# Altium PCB MCUBOARD_V1.PcbDoc (part 2 of 2)
Units mm, origin at the board's own origin, x right, y up, seen from the top; angles counter-clockwise.
Board outline 60 x 75 mm, 6 copper layers (GND-SIG1, SIG, GND, PWR, GND-1, GND-SIG2), stack 0.816 mm thick; 132 components, 125 nets, 546 pads, 166 vias.
Unrouted connection lines stored in the file: 93.
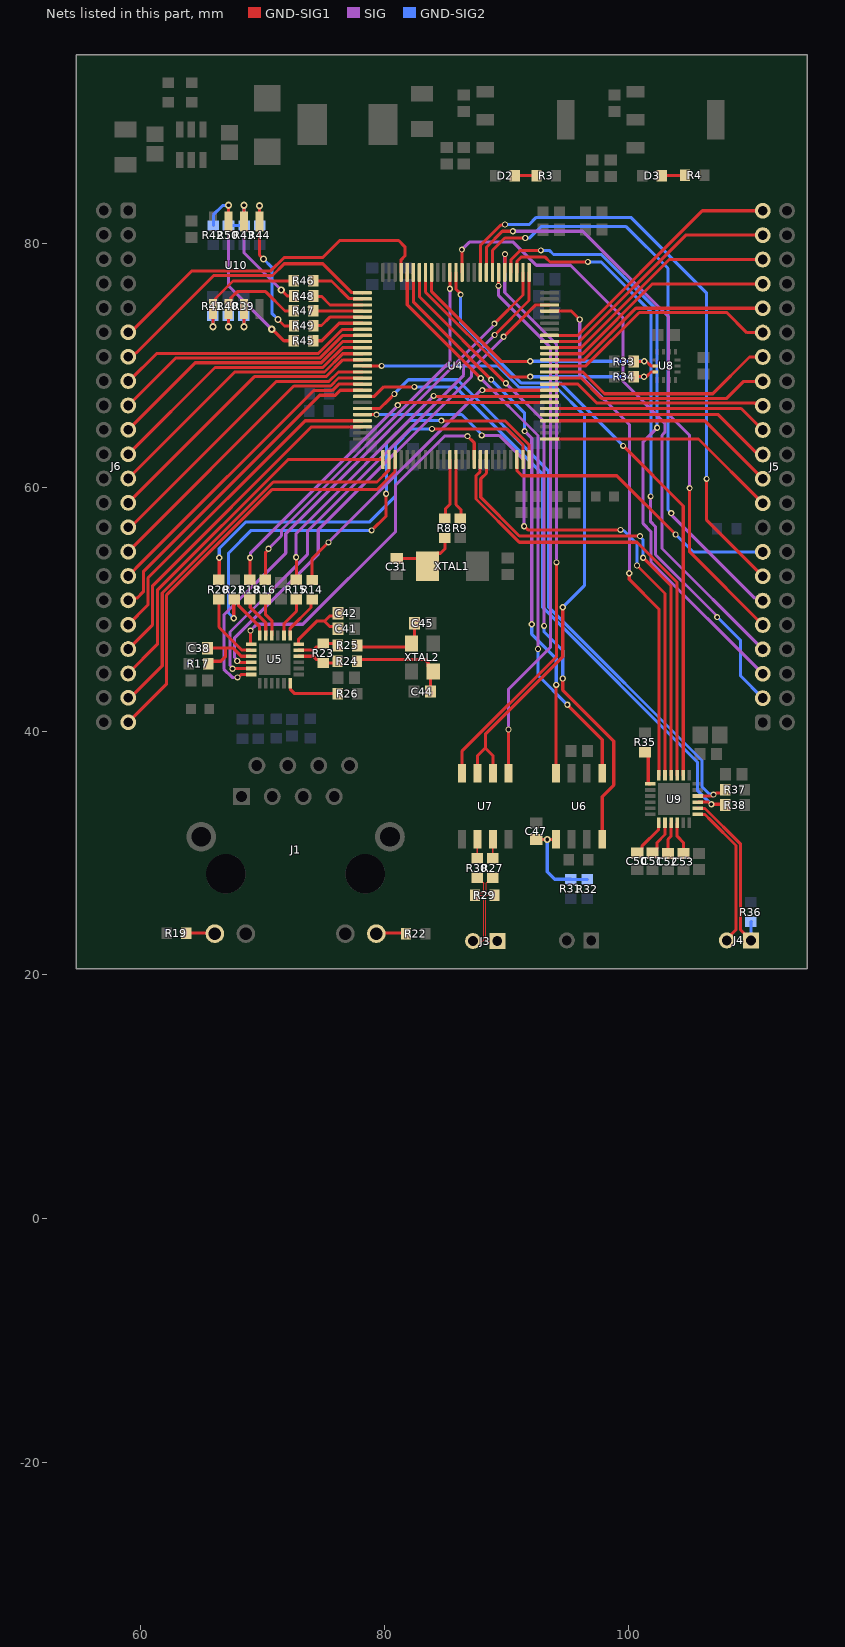
[diagram p5: the nets of this part, all layers, seen from the top]

## Via types
v1: diameter 0.6, hole 0.3, GND-SIG1 to GND-SIG2, tented both sides, 88 vias
v2: diameter 0.5, hole 0.3, GND-SIG1 to GND-SIG2, tented both sides, 78 vias

## Nets (pads, with @x,y where several pads share a name; then routed paths per layer and width w, separated by ;. In a path a pad name is that pad's centre, name@x,y a point inside that pad or via, vN(x,y) a via of type N, cw(c..) or ccw(c..) an arc to the next point about the centre after c; other vN are vias at no path point) (continued)
NetC31_1: C31.1 R8.1 XTAL1.1 | length 5.9
  GND-SIG1 w0.254: C31.1@81,54.183 82.856,54.183 XTAL1.1@83.511,53.527 83.511,53.777 84.334,54.6 84.588,54.6 84.949,54.962 R8.1@84.949,55.852
NetC41_1: C41.1 C42.2 U5.6 | length 5.9
  GND-SIG1 w0.254: U5.6@72.939,47.142 72.939,47.539 74.422,49.022 75.057,49.022 ; C42.2@76.167,49.672 75.945,49.45 75.485,49.45 75.057,49.022 ; C41.1@76.18,48.397 75.995,48.582 75.497,48.582 75.057,49.022
NetC44_1: C44.1 R24.2 XTAL2.3 | length 8.7
  GND-SIG1 w0.254: R24.2@77.728,45.731 77.888,45.891 83.291,45.891 83.58,45.603 83.58,45.317 XTAL2.3@84.003,44.894 83.758,44.649 C44.1@83.758,43.24
NetC45_1: C45.1 R25.1 XTAL2.1 | length 6.4
  GND-SIG1 w0.254: R25.1@77.752,47.028 77.884,46.896 81.904,46.896 XTAL2.1@82.203,47.194 82.447,47.439 C45.1@82.447,48.849
NetC47_1: C47.1 R31.2 R32.1 U6.5 | length 7.7
  GND-SIG1 w0.254: C47.1@92.516,31.1 93.342,31.1 94.03,31.1 U6.5@94.05,31.12
  GND-SIG2 w0.254: v1@93.345,31.115 93.345,28.448 93.949,27.844 R31.2@95.29,27.844 95.299,27.834 R32.1@96.627,27.834
  other v1: 93.342,31.104
NetC50_2: C50.2 U9.1 | length 3.2
  GND-SIG1 w0.254: C50.2@100.738,29.991 100.788,29.991 101.111,30.314 101.111,30.542 102.486,31.917 102.486,32.444 U9.1@102.509,32.467
NetC51_1: C51.1 U9.2 | length 2.9
  GND-SIG1 w0.254: C51.1@101.991,29.992 102.041,29.992 102.364,30.315 102.364,30.863 103.009,31.508 U9.2@103.009,32.467
NetC52_1: C52.1 U9.3 | length 2.6
  GND-SIG1 w0.254: C52.1@103.251,29.972 103.251,31.115 103.505,31.369 103.505,32.463 U9.3@103.509,32.467
NetC53_2: C53.2 U9.4 | length 2.7
  GND-SIG1 w0.254: U9.4@104.009,32.467 104.009,31.373 104.521,30.861 C53.2@104.521,29.972
NetD2_1: D2.1 R3.2 | length 1.8
  GND-SIG1 w0.254: D2.1@90.678,85.598 R3.2@92.468,85.598
NetD3_1: D3.1 R4.2 | length 1.9
  GND-SIG1 w0.254: D3.1@102.743,85.598 104.63,85.598 R4.2@104.653,85.621
NetJ1_9: J1.9 R19.1 | length 2.4
  GND-SIG1 w0.254: R19.1@63.715,23.391 63.745,23.421 J1.9@66.151,23.421
NetJ1_12: J1.12 R22.1 | length 2.4
  GND-SIG1 w0.254: J1.12@79.401,23.421 81.711,23.421 R22.1@81.756,23.376
NetJ5_3: J5.3 U4.53 | length 49.4
  GND-SIG1 w0.254: U4.53@90.854,77.655 90.867,77.668 90.867,78.571 91.194,78.898 93.174,78.898 93.576,78.496 96.666,78.496 v2(96.683,78.512)
  SIG w0.254: v2(101.833,59.265) 101.833,57.171 102.235,56.769 102.235,54.483 v2@107.315,49.403
  GND-SIG2 w0.254: v2(96.683,78.512) 97.764,78.512 101.854,74.422 v2@101.854,59.309 ; v2(107.294,49.359) 109.22,47.432 109.22,44.518 J5.3@111.03,42.708
NetJ5_5: J5.5 U4.54 | length 49.8
  GND-SIG1 w0.254: U4.54@90.354,77.655 90.354,78.67 91.144,79.46 v2(92.821,79.46)
  SIG w0.254: v2(102.366,64.901) 101.219,63.753 101.219,57.023 101.854,56.388 101.854,53.884 J5.5@111.03,44.708
  GND-SIG2 w0.254: v2(92.821,79.46) 93.514,79.46 93.853,79.121 97.79,79.121 102.366,74.545 v2@102.366,64.887
NetJ5_7: J5.7 U4.62 | length 50.1
  GND-SIG1 w0.254: v2(86.338,79.52) 86.354,79.504 U4.62@86.354,77.655
  SIG w0.254: v2(86.338,79.52) 86.955,80.137 90.551,80.137 92.456,78.232 95.25,78.232 99.568,73.914 99.568,68.707 102.997,65.278 102.997,64.516 102.757,64.276 102.757,54.981 J5.7@111.03,46.708
NetJ5_9: J5.9 U4.58 | length 49.1
  GND-SIG1 w0.254: U4.58@88.354,77.655 88.354,79.718 89.662,81.026 v2(90.526,81.026) ; v2(105.029,59.944) 105.029,54.709 J5.9@111.03,48.708
  SIG w0.254: v2(90.526,81.026) 96.266,81.026 103.311,73.981 103.311,65.98 105.029,64.262 v2(105.029,59.944) ; J5.9@110.922,48.816 J5.9@111.03,48.708
NetJ5_11: J5.11 U4.57 | length 49.2
  GND-SIG1 w0.254: U4.57@88.854,77.655 88.854,79.456 89.866,80.468 v2(91.541,80.468)
  SIG w0.254: v2(103.523,57.886) 103.571,57.839 103.571,57.719 110.382,50.908 110.83,50.908 J5.11@111.03,50.708
  GND-SIG2 w0.254: v2(91.541,80.468) 91.554,80.482 91.912,80.482 92.837,81.407 99.822,81.407 103.251,77.978 103.251,58.159 v2(103.523,57.886)
NetJ5_13: J5.13 U4.59 | length 49.5
  GND-SIG1 w0.254: U4.59@87.854,77.655 87.854,79.853 89.536,81.535 89.835,81.535 v2(89.877,81.578) ; v2(106.426,60.706) 106.426,57.312 J5.13@111.03,52.708
  GND-SIG2 w0.254: v2(89.877,81.578) 91.865,81.578 92.456,82.169 100.203,82.169 106.426,75.946 v2(106.426,60.706)
NetJ5_15: J5.15 U4.23 | length 23.9
  GND-SIG1 w0.254: U4.23@90.854,62.295 90.854,61.384 91.278,60.96 99.06,60.96 v2(103.886,56.134)
  GND-SIG2 w0.254: v2(103.886,56.134) 105.312,54.708 J5.15@111.03,54.708
NetJ5_19: J5.19 U4.26 | length 19.7
  GND-SIG1 w0.254: U4.26@93.534,63.975 105.763,63.975 J5.19@111.03,58.708
NetJ5_21: J5.21 U4.29 | length 19.5
  GND-SIG1 w0.254: U4.29@93.534,65.475 106.263,65.475 J5.21@111.03,60.708
NetJ5_23: J5.23 U4.30 | length 18.8
  GND-SIG1 w0.254: U4.30@93.534,65.975 107.38,65.975 J5.23@110.871,62.484
NetJ5_25: J5.25 U4.31 | length 18.2
  GND-SIG1 w0.254: U4.31@93.534,66.475 109.263,66.475 J5.25@111.03,64.708
NetJ5_27: J5.27 U4.35 | length 18.2
  GND-SIG1 w0.254: U4.35@93.534,68.475 95.863,68.475 97.409,66.929 110.358,66.929 110.379,66.908 110.83,66.908 J5.27@111.03,66.708
NetJ5_29: J5.29 U4.36 | length 18.8
  GND-SIG1 w0.254: U4.36@93.534,68.975 96.125,68.975 97.79,67.31 108.077,67.31 109.475,68.708 J5.29@111.03,68.708
NetJ5_31: J5.31 U4.37 | length 19.4
  GND-SIG1 w0.254: U4.37@93.595,69.469 96.266,69.469 98.044,67.691 106.934,67.691 109.951,70.708 J5.31@111.03,70.708
NetJ5_33: J5.33 U4.38 | length 20
  GND-SIG1 w0.254: U4.38@93.534,69.975 96.518,69.975 100.907,74.364 108.077,74.364 109.733,72.708 J5.33@111.03,72.708
NetJ5_35: J5.35 U4.39 | length 19.2
  GND-SIG1 w0.254: U4.39@93.534,70.475 96.383,70.475 100.616,74.708 J5.35@111.03,74.708
NetJ5_37: J5.37 U4.40 | length 19.9
  GND-SIG1 w0.254: U4.40@93.534,70.975 96.248,70.975 101.981,76.708 J5.37@111.03,76.708
NetJ5_39: J5.39 U4.41 | length 20.5
  GND-SIG1 w0.254: U4.41@93.534,71.475 96.113,71.475 103.346,78.708 J5.39@111.03,78.708
NetJ5_41: J5.41 U4.42 | length 21.1
  GND-SIG1 w0.254: U4.42@93.534,71.975 95.978,71.975 104.711,80.708 J5.41@111.03,80.708
NetJ5_43: J5.43 U4.43 | length 21.7
  GND-SIG1 w0.254: U4.43@93.534,72.475 95.843,72.475 106.076,82.708 J5.43@111.03,82.708
NetJ6_11: J6.11 U4.72 | length 28.3
  GND-SIG1 w0.254: J6.11@58.991,72.581 64.185,77.774 70.662,77.774 71.755,78.867 74.92,78.867 76.317,80.264 81.153,80.264 81.661,79.756 81.661,78.994 81.354,78.687 U4.72@81.354,77.655
NetJ6_13: J6.13 U4.76 | length 23.4
  GND-SIG1 w0.254: J6.13@58.95,70.731 59.233,70.731 59.533,71.031 59.601,71.031 65.971,77.401 70.797,77.401 71.755,78.359 74.93,78.359 77.301,75.988 78.161,75.988 U4.76@78.174,75.975
NetJ6_15: J6.15 U4.82 | length 20.9
  GND-SIG1 w0.254: J6.15@59.003,68.71 61.286,70.993 74.549,70.993 76.518,72.962 78.161,72.962 U4.82@78.174,72.975
NetJ6_17: J6.17 U4.83 | length 21.6
  GND-SIG1 w0.254: J6.17@58.95,66.731 62.831,70.612 74.676,70.612 76.526,72.462 78.161,72.462 U4.83@78.174,72.475
NetJ6_19: J6.19 U4.84 | length 22.2
  GND-SIG1 w0.254: J6.19@58.95,64.731 64.45,70.231 74.803,70.231 76.547,71.975 U4.84@78.174,71.975
NetJ6_21: J6.21 U4.85 | length 22.8
  GND-SIG1 w0.254: J6.21@58.95,62.731 66.069,69.85 74.93,69.85 76.555,71.475 U4.85@78.174,71.475
NetJ6_23: J6.23 U4.86 | length 23.5
  GND-SIG1 w0.254: J6.23@58.95,60.731 67.688,69.469 75.057,69.469 76.563,70.975 U4.86@78.174,70.975
NetJ6_25: J6.25 U4.87 | length 24.1
  GND-SIG1 w0.254: J6.25@58.95,58.731 69.307,69.088 75.184,69.088 76.571,70.475 U4.87@78.174,70.475
NetJ6_27: J6.27 U4.89 | length 24.6
  GND-SIG1 w0.254: J6.27@58.928,56.515 71.12,68.707 75.438,68.707 76.206,69.475 U4.89@78.174,69.475
NetJ6_29: J6.29 U4.90 | length 25.1
  GND-SIG1 w0.254: J6.29@58.95,54.731 72.545,68.326 75.565,68.326 76.214,68.975 U4.90@78.174,68.975
NetJ6_31: J6.31 U4.91 | length 25.7
  GND-SIG1 w0.254: J6.31@58.95,52.731 60.198,53.979 74.164,67.945 75.692,67.945 76.222,68.475 U4.91@78.174,68.475
NetJ6_33: J6.33 U4.92 | length 27.3
  GND-SIG1 w0.254: J6.33@58.95,50.731 59.151,50.931 59.694,50.931 60.198,51.435 60.198,53.086 74.676,67.564 75.946,67.564 76.357,67.975 U4.92@78.174,67.975
NetJ6_35: J6.35 U4.97 | length 27.5
  GND-SIG1 w0.254: J6.35@58.95,48.731 60.579,50.36 60.579,52.578 73.476,65.475 U4.97@78.174,65.475
NetJ6_37: J6.37 U4.98 | length 28.7
  GND-SIG1 w0.254: J6.37@58.95,46.731 60.96,48.741 60.96,51.943 73.992,64.975 U4.98@78.174,64.975
NetJ6_39: J6.39 U4.1 | length 30.8
  GND-SIG1 w0.254: J6.39@58.95,44.731 61.341,47.122 61.341,51.562 72.074,62.295 U4.1@79.854,62.295
NetJ6_41: J6.41 U4.2 | length 33.8
  GND-SIG1 w0.254: J6.41@58.801,42.418 61.744,45.361 61.744,51.33 70.866,60.452 79.375,60.452 80.341,61.418 80.341,62.282 U4.2@80.354,62.295
NetJ6_43: J6.43 U4.3 | length 35.7
  GND-SIG1 w0.254: J6.43@58.95,40.731 62.103,43.884 62.103,51.181 70.739,59.817 79.375,59.817 80.854,61.296 U4.3@80.854,62.295
NetR8_2: R8.2 U4.12 | length 5.1
  GND-SIG1 w0.254: R8.2@84.986,57.392 84.986,58.233 85.352,58.599 U4.12@85.352,62.297
NetR9_2: R9.2 U4.13 | length 5.1
  GND-SIG1 w0.254: U4.13@85.852,62.297 85.852,58.589 86.256,58.185 R9.2@86.256,57.392
NetR14_1: R14.1 U4.34 | length 27
  GND-SIG1 w0.254: R14.1@74.041,52.4 74.041,54.134 v2(75.393,55.487) ; v2(88.019,67.98) 88.024,67.975 U4.34@93.53,67.975
  SIG w0.254: v2(75.393,55.487) 75.395,55.487 87.841,67.933 87.971,67.933 v2(88.019,67.98)
NetR14_2: R14.2 U5.7 | length 3.7
  GND-SIG1 w0.254: U5.7@72.239,47.842 72.247,47.85 72.247,48.439 73.951,50.143 73.951,50.71 R14.2@74.041,50.8
NetR15_1: R15.1 U4.33 | length 29.3
  GND-SIG1 w0.254: v2(72.732,54.268) 72.771,54.229 72.771,52.435 R15.1@72.748,52.412 ; v2(84.021,67.513) 84.062,67.472 U4.33@93.531,67.472
  SIG w0.254: v2(72.732,54.268) 72.732,56.223 v2(84.021,67.513)
NetR15_2: R15.2 U5.8 | length 3.4
  GND-SIG1 w0.254: U5.8@71.739,47.842 71.739,48.811 72.771,49.843 72.771,50.789 R15.2@72.748,50.812
NetR16_1: R16.1 U4.64 | length 31.5
  GND-SIG1 w0.254: R16.1@70.208,52.412 70.208,54.644 70.463,54.899 v2(70.463,54.966) ; U4.64@85.352,77.657 U4.64@85.354,77.655 v2@85.353,76.305
  SIG w0.254: v2(70.463,54.966) 71.538,56.04 71.538,56.511 85.352,70.325 v2(85.352,76.304)
NetR16_2: R16.2 U5.10 | length 3.2
  GND-SIG1 w0.254: R16.2@70.208,50.812 70.208,49.592 70.739,49.061 U5.10@70.739,47.842
NetR18_1: R18.1 U4.32 | length 31.9
  GND-SIG1 w0.254: R18.1@68.938,52.412 68.961,52.435 v2(68.961,54.229) ; v2(81.072,66.757) 81.124,66.757 81.344,66.977 U4.32@93.532,66.977
  SIG w0.254: v2(68.961,54.229) 68.973,54.241 68.973,54.602 81.072,66.701 v2(81.072,66.757)
NetR18_2: R18.2 U5.11 | length 3.5
  GND-SIG1 w0.254: R18.2@68.938,50.812 68.971,50.779 68.971,50.155 70.239,48.887 U5.11@70.239,47.842
NetR20_1: R20.1 U4.24 | length 35.8
  GND-SIG1 w0.254: R20.1@66.398,52.412 66.421,52.435 v2(66.421,54.229) ; v2(83.889,64.809) 83.919,64.78 90.074,64.78 91.354,63.5 U4.24@91.354,62.295
  GND-SIG2 w0.254: v2(66.421,54.229) 66.421,54.991 68.58,57.15 78.74,57.15 80.899,59.309 80.899,63.5 82.208,64.809 v2(83.889,64.809)
NetR20_2: R20.2 U5.14 | length 5.7
  GND-SIG1 w0.254: R20.2@66.398,50.812 66.398,48.537 68.293,46.642 U5.14@69.039,46.642
NetR21_2: R21.2 U4.25 U5.12 | length 45.6
  GND-SIG1 w0.254: v2(67.614,49.261) 67.614,50.758 R21.2@67.668,50.812 ; R21.2@67.718,50.812 68.016,50.514 68.016,50.281 69.739,48.558 U5.12@69.739,47.842 ; v2(78.937,56.475) 80.12,57.658 v2(80.12,59.483) ; v2(84.654,65.481) 84.676,65.459 89.895,65.459 91.854,63.5 U4.25@91.854,62.295
  GND-SIG2 w0.254: v2(67.614,49.261) 67.183,49.692 67.183,54.61 69.048,56.475 v2(78.937,56.475) ; v2(80.12,59.483) 80.137,59.5 80.137,63.62 81.998,65.481 v2(84.654,65.481)
NetR23_1: R23.1 R25.2 U5.5 | length 3.5
  GND-SIG1 w0.254: U5.5@72.939,46.642 74.122,46.642 74.375,46.895 74.653,46.895 R23.1@74.951,47.193 75.987,47.193 R25.2@76.152,47.028
NetR23_2: R23.2 R24.1 U5.4 | length 3.5
  GND-SIG1 w0.254: U5.4@72.939,46.142 74.127,46.142 74.378,45.891 74.653,45.891 R23.2@74.951,45.593 75.99,45.593 R24.1@76.128,45.731
NetR26_2: R26.2 U5.24 | length 4.6
  GND-SIG1 w0.254: U5.24@72.239,43.942 72.262,43.919 72.262,43.432 72.623,43.071 R26.2@76.152,43.071
NetR27_1: R27.1 U7.7 | length 1.6
  GND-SIG1 w0.127: R27.1@88.877,29.552 88.881,29.556 U7.7@88.881,31.115
NetR30_1: R30.1 U7.6 | length 1.6
  GND-SIG1 w0.127: R30.1@87.607,29.552 87.611,29.556 U7.6@87.611,31.115
NetR33_2: R33.2 U4.67 U8.13 | length 23.3
  GND-SIG1 w0.254: U4.67@83.852,77.657 83.852,76.073 89.573,70.352 91.942,70.352 v2(91.948,70.358) ; R33.2@100.445,70.335 101.496,70.335 101.852,69.979 102.21,69.979 U8.13@102.211,69.977
  GND-SIG2 w0.254: v2(91.948,70.358) 101.261,70.357 v2@101.27,70.348
  other v2: 101.307,70.357
NetR34_1: R34.1 U4.68 U8.14 | length 24.4
  GND-SIG1 w0.254: U4.68@83.352,77.657 83.352,76.033 90.323,69.062 91.922,69.062 v2(91.948,69.088) ; R34.1@100.457,69.088 101.473,69.088 101.862,69.477 U8.14@102.211,69.477
  GND-SIG2 w0.254: v2(91.948,69.088) 91.951,69.085 101.28,69.085 v2@101.283,69.082
  other v2: 101.281,69.082
NetR35_1: R35.1 U9.19 | length 2.9
  GND-SIG1 w0.254: R35.1@101.369,38.266 101.636,37.999 101.636,35.69 101.659,35.667 U9.19@101.809,35.667
NetR37_2: R37.2 U4.95 U9.10 | length 54.1
  GND-SIG1 w0.254: U4.95@78.174,66.475 78.187,66.488 79.622,66.488 80.283,67.149 v2(80.801,67.667) ; U9.10@105.709,34.667 106.93,34.667 107.188,34.925 107.812,34.925 R37.2@107.962,35.075
  GND-SIG2 w0.254: v2(80.801,67.667) 80.801,67.685 81.95,68.834 85.979,68.834 93.472,61.341 93.472,50.165 106.045,37.592 106.045,35.433 106.647,34.831 106.942,34.831 v2(106.987,34.786)
NetR38_2: R38.2 U4.93 U9.9 | length 53.3
  GND-SIG1 w0.254: U4.93@78.174,67.475 79.159,67.475 79.939,68.255 v2(82.439,68.255) ; U9.9@105.709,34.167 106.574,34.167 106.743,33.998 v2(106.81,33.998) 107.833,33.998 R38.2@107.962,33.869
  GND-SIG2 w0.254: v2(82.439,68.255) 85.796,68.255 92.964,61.087 92.964,50.165 105.664,37.465 105.664,35.144 v2(106.81,33.998)
NetR39_1: R39.1 U10.3 | length 2.3
  GND-SIG1 w0.254: U10.3@68.453,74.632 68.455,74.63 v1(68.456,73.192) v1(68.456,73.192)
  GND-SIG2 w0.254: R39.1@68.43,74.08 68.456,74.054 v1(68.456,73.192)
NetR40_1: R40.1 R47.2 U10.2 | length 9.3
  GND-SIG1 w0.254: v1(67.18,73.186) 67.181,73.187 U10.2@67.181,74.573 ; U10.2@67.183,74.632 67.381,74.83 67.381,75.542 67.912,76.073 70.231,76.073 71.818,74.486 R47.2@72.55,74.486
  GND-SIG2 w0.254: R40.1@67.14,74.041 67.18,74.001 v1(67.18,73.186)
NetR41_1: R41.1 R46.2 U10.1 | length 10.2
  GND-SIG1 w0.254: v1(65.912,73.189) U10.1@65.913,74.585 ; U10.1@65.913,74.632 66.111,74.83 66.111,75.509 67.551,76.949 R46.2@72.552,76.949
  GND-SIG2 w0.254: v1(65.912,73.189) 65.912,74.018 R41.1@65.924,74.03
NetR42_1: R42.1 R45.1 U10.7 | length 17.7
  GND-SIG1 w0.254: U10.7@67.183,81.832 v1(67.183,83.148) ; v1@70.739,73.025 71.723,72.041 R45.1@72.552,72.041
  SIG w0.254: v1@67.183,83.185 67.183,76.543 v1(70.739,72.988)
  GND-SIG2 w0.254: R42.1@65.936,81.495 65.936,82.373 66.702,83.139 67.174,83.139 v1(67.183,83.148)
NetR43_1: R43.1 R48.1 R50.2 U10.6 | length 13.8
  GND-SIG1 w0.254: U10.6@68.453,81.832 v1(68.453,83.148) ; v1(71.501,76.2) 71.992,75.709 R48.1@72.555,75.709
  SIG w0.254: v1@68.453,83.185 68.453,79.248 v1(71.501,76.2)
  GND-SIG2 w0.254: R50.2@67.182,81.495 R43.1@68.476,81.495 68.453,81.518 v1(68.453,83.148)
NetR44_1: R44.1 R49.1 U10.5 | length 13.2
  GND-SIG1 w0.254: v1(69.723,83.128) U10.5@69.723,81.832 69.723,79.068 70.045,78.746 v1(70.06,78.746) ; v1(71.247,73.787) 71.778,73.256 R49.1@72.556,73.256
  GND-SIG2 w0.254: v1(69.723,83.128) 69.723,81.518 R44.1@69.746,81.495 ; v1(70.06,78.746) 70.739,78.067 70.739,74.295 v1(71.247,73.787)
NetR45_2: R45.2 U4.81 | length 4.6
  GND-SIG1 w0.254: R45.2@74.152,72.041 74.835,72.041 76.271,73.477 U4.81@78.172,73.477
NetR46_1: R46.1 U4.77 | length 4.6
  GND-SIG1 w0.254: R46.1@74.152,76.949 75.636,76.949 77.095,75.49 77.46,75.49 77.462,75.488 78.161,75.488 U4.77@78.172,75.477
NetR47_1: R47.1 U4.79 | length 4
  GND-SIG1 w0.254: R47.1@74.15,74.483 U4.79@78.166,74.483
NetR48_2: R48.2 U4.78 | length 4.3
  GND-SIG1 w0.254: R48.2@74.155,75.709 74.18,75.683 74.812,75.683 75.52,74.975 U4.78@78.174,74.975
NetR49_2: R49.2 U4.80 | length 4.3
  GND-SIG1 w0.254: R49.2@74.191,73.256 74.224,73.289 74.813,73.289 75.501,73.977 U4.80@78.172,73.977
NetU4_16: U4.16 U5.13 | length 29.9
  GND-SIG1 w0.254: v2(68.991,48.25) 68.991,47.165 69.014,47.142 U5.13@69.039,47.142 ; v2(86.802,64.21) 87.354,63.659 U4.16@87.354,62.295
  SIG w0.254: v2(68.991,48.25) 69.508,48.768 73.279,48.768 80.899,56.388 80.899,60.198 84.911,64.21 v2(86.802,64.21)
NetU4_17: U4.17 U9.15 | length 38.6
  GND-SIG1 w0.254: U4.17@87.854,62.295 87.841,62.282 87.841,61.298 87.503,60.96 87.503,59.055 91.059,55.499 100.711,55.499 104.009,52.201 U9.15@104.009,36.367
NetU4_18: U4.18 U9.16 | length 38.4
  GND-SIG1 w0.254: U4.18@88.354,62.295 88.354,61.176 87.884,60.706 87.884,59.182 91.059,56.007 100.958,56.007 v2(100.961,56.004) ; v2(101.219,54.229) 103.509,51.939 U9.16@103.509,36.367
  GND-SIG2 w0.254: v2(100.961,56.004) 100.961,55.938 101.219,55.68 v2(101.219,54.229)
NetU4_47: U4.47 U9.18 | length 42.9
  GND-SIG1 w0.254: U4.47@93.534,74.475 95.324,74.475 v2(96.012,73.787) ; v2(100.076,52.959) 100.076,52.451 102.509,50.018 U9.18@102.509,36.367
  SIG w0.254: v2(96.012,73.787) 96.012,69.215 100.108,65.119 100.108,52.991 v2(100.076,52.959)
NetU4_48: U4.48 U5.16 | length 41.9
  GND-SIG1 w0.254: v2(67.901,45.759) 67.968,45.759 68.084,45.642 U5.16@69.039,45.642 ; v2(89.766,72.369) 92.359,74.962 93.517,74.962 U4.48@93.532,74.977
  SIG w0.254: v2(67.901,45.759) 67.901,45.825 67.691,46.035 67.691,47.664 74.549,54.522 74.549,56.515 87.122,69.088 87.122,69.658 89.766,72.303 v2(89.766,72.369)
NetU4_51: U4.51 U5.17 | length 44.3
  GND-SIG1 w0.254: v2(67.507,45.116) 67.52,45.129 69.026,45.129 U5.17@69.039,45.142 ; v2(89.027,72.517) 91.852,75.342 U4.51@91.852,77.657
  SIG w0.254: v2(67.507,45.116) 67.507,45.183 67.31,45.379 67.31,48.133 73.66,54.483 73.66,56.388 86.487,69.215 86.487,69.977 v2(89.027,72.517)
NetU4_52: U4.52 U5.18 | length 45.4
  GND-SIG1 w0.254: v2(67.917,44.408) 67.984,44.408 68.218,44.642 U5.18@69.039,44.642 ; v2(89.009,73.445) 91.354,75.791 U4.52@91.354,77.655
  SIG w0.254: v2(67.917,44.408) 67.479,44.408 66.802,45.085 66.802,49.53 71.882,54.61 71.882,56.208 88.886,73.211 88.886,73.256 89.009,73.379 v2(89.009,73.445)
NetU4_55: U4.55 U7.4 | length 49.1
  GND-SIG1 w0.254: U7.4@86.341,36.539 86.341,38.335 94.107,46.101 v2(94.107,53.848) ; U4.55@89.854,77.655 89.864,77.665 89.864,79.136 v2(89.878,79.15)
  SIG w0.254: v2(89.878,79.15) 89.858,79.131 89.858,76.004 94.107,71.755 v2(94.107,53.848)
NetU4_56: U4.56 U7.1 | length 44.3
  GND-SIG1 w0.254: v2(89.346,76.544) 89.35,76.548 89.35,77.651 U4.56@89.354,77.655 ; U7.1@90.151,36.539 90.161,36.548 90.161,40.123 v2(90.17,40.132)
  SIG w0.254: v2(89.346,76.544) 89.359,76.531 89.359,75.741 93.599,71.501 93.599,46.863 90.17,43.434 v2(90.17,40.132)
NetU4_63: U4.63 U9.14 | length 50.9
  GND-SIG1 w0.254: U4.63@85.854,77.655 85.856,77.653 85.856,76.262 86.233,75.886 v2(86.233,75.819) ; v2(99.575,63.412) 104.509,58.478 U9.14@104.509,36.367
  GND-SIG2 w0.254: v2(86.233,75.819) 86.233,73.533 91.182,68.584 94.403,68.584 v2(99.575,63.412)
NetU4_69: U4.69 U6.8 | length 53.5
  GND-SIG1 w0.254: U4.69@82.854,77.655 82.854,75.641 v2(89.945,68.55) ; v2(94.616,44.324) 94.615,43.358 98.806,39.167 98.806,35.56 97.86,34.614 U6.8@97.86,31.12
  SIG w0.254: v2@89.946,68.55 93.091,65.405 v2(93.091,48.641)
  GND-SIG2 w0.254: v2(93.091,48.641) 93.091,48.133 94.615,46.609 v2(94.616,44.324)
NetU4_70: U4.70 U6.4 | length 46
  GND-SIG1 w0.254: U4.70@82.354,77.655 82.354,75.226 v2(88.738,68.842) ; U6.4@94.05,36.544 94.066,36.56 94.066,43.774 v2(94.082,43.79)
  SIG w0.254: v2(91.491,64.624) 92.075,64.04 v2(92.075,48.768)
  GND-SIG2 w0.254: v2(88.738,68.842) 91.491,66.089 v2(91.491,64.624) ; v2(92.075,48.768) 92.075,47.957 94.082,45.95 v2@94.082,43.791
NetU4_71: U4.71 U6.1 | length 47.7
  GND-SIG1 w0.254: U4.71@81.854,77.655 81.854,74.991 v2(87.884,68.961) ; v2(94.996,42.164) 97.86,39.3 U6.1@97.86,36.544
  SIG w0.254: v2(87.884,68.961) 92.583,64.262 v2(92.583,46.736)
  GND-SIG2 w0.254: v2(92.583,46.736) 92.583,44.577 v2(94.996,42.164)
NetU4_88: U4.88 U7.2 U7.3 | length 55.3
  GND-SIG1 w0.254: U4.88@78.174,69.975 78.175,69.976 v2(79.756,69.977) v2(79.756,69.977) ; U7.3@87.611,36.539 87.611,37.954 88.265,38.608 ; U7.2@88.881,36.539 88.881,37.992 88.265,38.608 ; v2(94.615,50.165) 94.615,46.101 88.265,39.751 88.265,38.608
  GND-SIG2 w0.254: v2(79.756,69.977) 89.281,69.977 91.059,68.199 94.107,68.199 96.393,65.913 96.393,62.23 ; v2(94.615,50.165) 96.393,51.943 96.393,62.276
NetU4_96: U4.96 U9.17 | length 50.1
  GND-SIG1 w0.254: U4.96@78.174,65.975 78.175,65.976 79.332,65.976 v2(79.333,65.977) ; v2(91.449,56.814) 91.75,56.513 v2(99.354,56.513) ; v2(100.711,53.594) 103.009,51.296 U9.17@103.009,36.367
  SIG w0.254: v2(87.968,64.276) 89.394,64.276 91.449,62.221 v2(91.449,56.814)
  GND-SIG2 w0.254: v2(79.333,65.977) 79.343,65.987 86.321,65.987 87.968,64.34 v2(87.968,64.276) ; v2(99.354,56.513) 99.401,56.466 99.617,56.466 100.711,55.372 v2(100.711,53.594)
nRST: C38.1 R17.1 U5.15 | length 6.2
  GND-SIG1 w0.254: R17.1@65.509,45.73 66.558,45.73 66.929,46.101 66.929,46.806 ; C38.1@65.532,46.863 C38.1@65.475,46.806 66.929,46.806 ; U5.15@69.039,46.142 68.233,46.142 67.569,46.806 66.929,46.806
RS485_N: J3.1 R27.2 R29.2 | length 7.6
  GND-SIG1 w0.093: R27.2@88.877,27.952 88.499,27.574 88.388,27.574 88.334,27.519 88.334,26.963 88.334,26.767 88.388,26.712 88.823,26.712 R29.2@89.015,26.52 88.361,26.52 88.307,26.465 88.307,23.697 88.307,22.824 88.361,22.769 J3.1@89.269,22.769
RS485_P: J3.2 R29.1 R30.2 | length 7.6
  GND-SIG1 w0.093: J3.2@87.269,22.769 88.069,22.769 88.123,22.824 88.123,23.621 88.123,26.465 88.069,26.52 R29.1@87.415,26.52 87.607,26.712 88.096,26.712 88.15,26.767 88.15,27.039 88.15,27.519 88.096,27.574 87.985,27.574 R30.2@87.607,27.952
SPK_N: J4.1 R36.2 U9.8 | length 14.6
  GND-SIG1 w0.254: U9.8@105.709,33.667 105.731,33.645 106.293,33.645 109.22,30.718 109.22,23.68 J4.1@110.077,22.823
  GND-SIG2 w0.254: J4.1@110.077,22.823 110.059,22.841 R36.2@110.059,24.352 R36.2@110.109,24.352
SPK_P: J4.2 U9.7 | length 12.3
  GND-SIG1 w0.254: U9.7@105.709,33.167 105.724,33.152 106.3,33.152 106.807,32.645 108.839,30.613 108.839,23.688 108.077,22.926 J4.2@108.077,22.823
pads on no net: J1. U2.4 U3.4 U4.4 U4.5 U4.7 U4.8 U4.9 U4.15 U4.44 U4.45 U4.46 U4.60 U4.61 U4.65 U4.66 U8.1 U8.4 U8.9 U8.10 U8.11 U8.12 U9.20 U9.21 U9.22 U9.23

## Polygon pours and split planes (outlines as drawn)
AVDD on GND-SIG1 "c" (solid, pour order 10): 65.151,42.799 65.151,39.751 65.278,39.624 67.183,39.624 67.437,39.878 67.437,42.799 67.056,43.18 65.532,43.18
+3v3 on GND-SIG1 "c" (solid, pour order 9): 64.516,42.799 64.516,41.148 62.865,39.497 61.722,39.497 61.468,39.751 61.468,41.91 62.357,42.799
+3v3 on GND-SIG1 "+24" (solid, pour order 8): 93.853,82.804 94.869,83.82 94.869,86.487 94.488,86.868 96.178,86.868 96.284,86.761 96.284,86.759 96.012,86.487 96.012,83.82 97.028,82.804 97.028,79.756 96.901,79.629 93.98,79.629 93.853,79.756
+1v8 on GND-SIG1 "+24" (solid, pour order 7): 98.298,91.313 103.759,91.313 104.267,90.805 104.267,87.884 104.013,87.63 102.362,87.63 102.235,87.757 102.235,88.646 101.6,89.281 98.679,89.281 98.298,89.662
+3v3 on GND-SIG1 "+24" (solid, pour order 6): 90.721,88.857 92.837,86.741 101.092,86.741 101.6,87.249 101.6,88.519 101.473,88.646 96.266,88.646 95.758,88.138 92.71,88.138 91.313,89.535 91.313,91.186 91.059,91.44
+3v3 on GND-SIG1 "+24" (solid, pour order 5): 85.598,91.44 85.471,91.313 85.471,89.662 85.598,89.535 89.408,89.535 90.17,88.773 91.059,88.773 91.186,88.9 91.186,91.313 91.059,91.44 89.408,91.44
+5V on GND-SIG1 "+24" (solid, pour order 3): 79.629,90.551 79.629,88.392 80.645,87.376 89.154,87.376 89.281,87.503 89.281,88.519 88.773,89.027 85.725,89.027 84.201,90.551
LX on GND-SIG1 "+24" (solid, pour order 1): 64.77,85.471 72.898,85.471 75.311,87.884 75.311,91.44 75.184,91.567 72.771,91.567 72.39,91.186 72.39,89.535 71.501,88.646 68.453,88.646 67.945,88.138 65.278,88.138 64.77,87.63
+24V on GND-SIG1 "+24" (solid, pour order 0): 56.007,81.915 59.69,81.915 60.198,82.423 60.198,85.217 61.214,86.233 64.446,86.233 64.453,86.24 64.437,86.255 64.437,87.565 62.367,87.565 61.856,88.075 60.389,88.075 59.563,87.249 57.658,87.249 56.007,85.598
GND on GND (split plane): 114.171,43.817 107.061,43.817 107.011,43.808 106.969,43.78 106.941,43.738 106.932,43.688 106.941,43.638 106.969,43.596 107.011,43.568 107.061,43.559 114.171,43.559 114.171,21.014 97.665,21.014 97.665,27.051 97.656,27.101 97.628,27.143 97.586,27.171 97.536,27.18 97.486,27.171 97.444,27.143 97.416,27.101 97.407,27.051 97.407,21.014 55.191,21.014 55.191,94.994 114.171,94.994
+5V on PWR (split plane): 84.834,87.684 83.258,86.108 65.659,86.108 65.609,86.099 65.567,86.071 62.011,82.515 61.983,82.473 61.974,82.423 61.974,61.214 61.983,61.164 62.011,61.122 65.186,57.947 65.228,57.919 65.278,57.91 75.13,57.91 80.934,52.105 80.976,52.077 81.026,52.068 87.195,52.068 91.565,47.698 91.565,42.672 91.574,42.622 91.602,42.58 93.761,40.421 93.803,40.393 93.853,40.384 97.038,40.384 97.661,39.761 97.661,38.662 97.101,38.102 93.526,38.102 90.68,40.948 90.68,46.863 90.671,46.913 90.643,46.955 86.579,51.019 86.537,51.047 86.487,51.056 81.207,51.056 75.784,56.48 75.742,56.508 75.692,56.517 65.205,56.517 61.216,60.506 61.216,76.708 61.207,76.758 61.179,76.8 60.115,77.863 60.073,77.891 60.023,77.901 55.191,77.901 55.191,79.627 59.69,79.627 59.74,79.636 59.782,79.664 60.163,80.045 60.191,80.087 60.2,80.137 60.2,81.534 60.2,82.242 64.608,86.649 64.636,86.691 64.645,86.741 64.645,94.994 84.834,94.994
AVDD on PWR (split plane): 65.059,56.296 65.101,56.268 65.151,56.259 68.959,56.259 68.959,50.546 68.968,50.496 68.996,50.454 70.901,48.549 70.943,48.521 70.993,48.512 78.613,48.512 78.663,48.521 78.705,48.549 78.865,48.709 78.865,33.836 78.305,33.276 66.475,33.276 64.264,35.487 64.264,57.091
+1v8 on PWR (split plane): 104.392,87.43 102.143,85.182 102.115,85.14 102.106,85.09 102.106,56.134 102.106,51.054 102.106,48.895 102.106,45.593 102.115,45.543 102.143,45.501 104.556,43.088 106.297,41.348 106.297,40.44 105.445,39.589 105.417,39.547 105.408,39.497 105.408,34.163 105.417,34.113 105.445,34.071 106.297,33.22 106.297,31.042 106.118,30.863 104.702,30.863 104.269,31.296 104.269,41.275 104.26,41.325 104.232,41.367 100.84,44.758 100.84,51.054 100.84,55.372 100.84,83.947 100.831,83.997 100.803,84.039 99.533,85.309 99.152,85.69 98.517,86.325 98.046,86.795 98.046,94.994 104.392,94.994
+24V on PWR (split plane): 64.387,86.795 59.979,82.388 59.951,82.346 59.942,82.296 59.942,81.663 55.191,81.663 55.191,94.994 64.387,94.994
GND on PWR (split plane): 59.942,80.191 59.636,79.885 55.191,79.885 55.191,81.405 59.942,81.405
+3v3 on PWR (split plane): 114.171,21.014 55.191,21.014 55.191,77.642 59.97,77.642 60.958,76.654 60.958,60.452 60.967,60.402 60.995,60.36 64.006,57.35 64.006,35.433 64.015,35.383 64.043,35.341 66.329,33.055 66.371,33.027 66.421,33.018 78.359,33.018 78.409,33.027 78.451,33.055 79.086,33.69 79.114,33.732 79.123,33.782 79.123,48.895 79.114,48.945 79.086,48.987 79.044,49.015 78.994,49.024 78.867,49.024 78.817,49.015 78.775,48.987 78.559,48.77 71.047,48.77 69.217,50.6 69.217,56.259 75.638,56.259 81.061,50.835 81.103,50.807 81.153,50.798 86.433,50.798 90.422,46.809 90.422,40.894 90.431,40.844 90.459,40.802 93.38,37.881 93.422,37.853 93.472,37.844 97.155,37.844 97.205,37.853 97.247,37.881 97.882,38.516 97.91,38.558 97.919,38.608 97.919,39.814 97.91,39.864 97.882,39.906 97.183,40.605 97.141,40.633 97.091,40.642 93.907,40.642 91.823,42.726 91.823,47.752 91.814,47.802 91.786,47.844 87.341,52.289 87.299,52.317 87.249,52.326 81.08,52.326 75.276,58.131 75.234,58.159 75.184,58.168 65.332,58.168 62.232,61.268 62.232,82.369 65.713,85.85 83.312,85.85 83.362,85.859 83.404,85.887 85.055,87.538 85.083,87.58 85.092,87.63 85.092,94.994 97.788,94.994 97.788,86.741 97.797,86.691 97.825,86.649 98.333,86.141 98.968,85.506 99.349,85.125 100.582,83.893 100.582,55.372 100.582,51.054 100.582,44.704 100.591,44.654 100.619,44.612 104.011,41.221 104.011,31.242 104.02,31.192 104.048,31.15 104.556,30.642 104.598,30.614 104.648,30.605 106.172,30.605 106.222,30.614 106.264,30.642 106.518,30.896 106.546,30.938 106.555,30.988 106.555,33.274 106.546,33.324 106.518,33.366 105.666,34.217 105.666,39.443 106.518,40.294 106.546,40.336 106.555,40.386 106.555,41.402 106.546,41.452 106.518,41.494 104.74,43.272 102.364,45.647 102.364,48.895 102.364,51.054 102.364,56.134 102.364,85.036 104.613,87.284 104.641,87.326 104.65,87.376 104.65,94.994 114.171,94.994

## Other copper
GND (plane layer: these items are gaps in the copper):
  lines w0.254: 97.536,20.447 97.536,27.051 ; 97.536,27.686 97.536,30.988 ; 97.536,31.496 97.536,41.275 ; 97.536,42.799 97.536,43.18 98.044,43.688 99.06,43.688 ; 100.203,43.688 106.045,43.688 ; 107.061,43.688 114.808,43.688
PWR (plane layer: these items are gaps in the copper):
  lines w0.254: 54.61,77.772 60.023,77.772 61.087,76.708 61.087,60.452 65.151,56.388 69.088,56.388 ; 54.61,79.756 59.69,79.756 60.071,80.137 60.071,81.534 ; 54.61,81.534 60.071,81.534 ; 64.135,57.404 64.135,35.433 66.421,33.147 78.359,33.147 78.994,33.782 78.994,48.895 78.867,48.895 78.613,48.641 70.993,48.641 69.088,50.546 69.088,56.388 ; 64.516,95.504 64.516,86.741 60.071,82.296 60.071,81.534 ; 84.963,95.631 84.963,87.63 83.312,85.979 65.659,85.979 62.103,82.423 62.103,61.214 65.278,58.039 75.184,58.039 81.026,52.197 87.249,52.197 91.694,47.752 91.694,42.672 93.853,40.513 97.091,40.513 97.79,39.814 97.79,38.608 97.155,37.973 93.472,37.973 90.551,40.894 90.551,46.863 86.487,50.927 81.153,50.927 75.692,56.388 69.088,56.388 ; 85.378,-30.881 90.904,-30.881 ; 97.917,95.631 97.917,86.741 98.425,86.233 99.06,85.598 99.441,85.217 100.711,83.947 100.711,55.372 100.711,51.054 100.711,44.704 104.14,41.275 104.14,31.242 104.648,30.734 106.172,30.734 106.426,30.988 106.426,33.274 105.537,34.163 105.537,39.497 106.426,40.386 106.426,41.402 104.648,43.18 102.235,45.593 102.235,48.895 102.235,51.054 102.235,56.134 102.235,85.09 104.521,87.376 104.521,95.504 103.505,95.504

## Silkscreen, mask and mechanical layers (free items; w line width, h text height)
Mechanical 1:
  the board outline again, w0.254